# Altium PCB EduBOT_v2.PcbDoc
Units mm, origin at the board's own origin, x right, y up, seen from the top; angles counter-clockwise.
Board outline 65 x 56 mm, 4 copper layers (Top Signal Layer, Power Layer, Ground Layer, Bottom Signal Layer), stack 2.024 mm thick; 49 components, 37 nets, 214 pads, 140 vias.
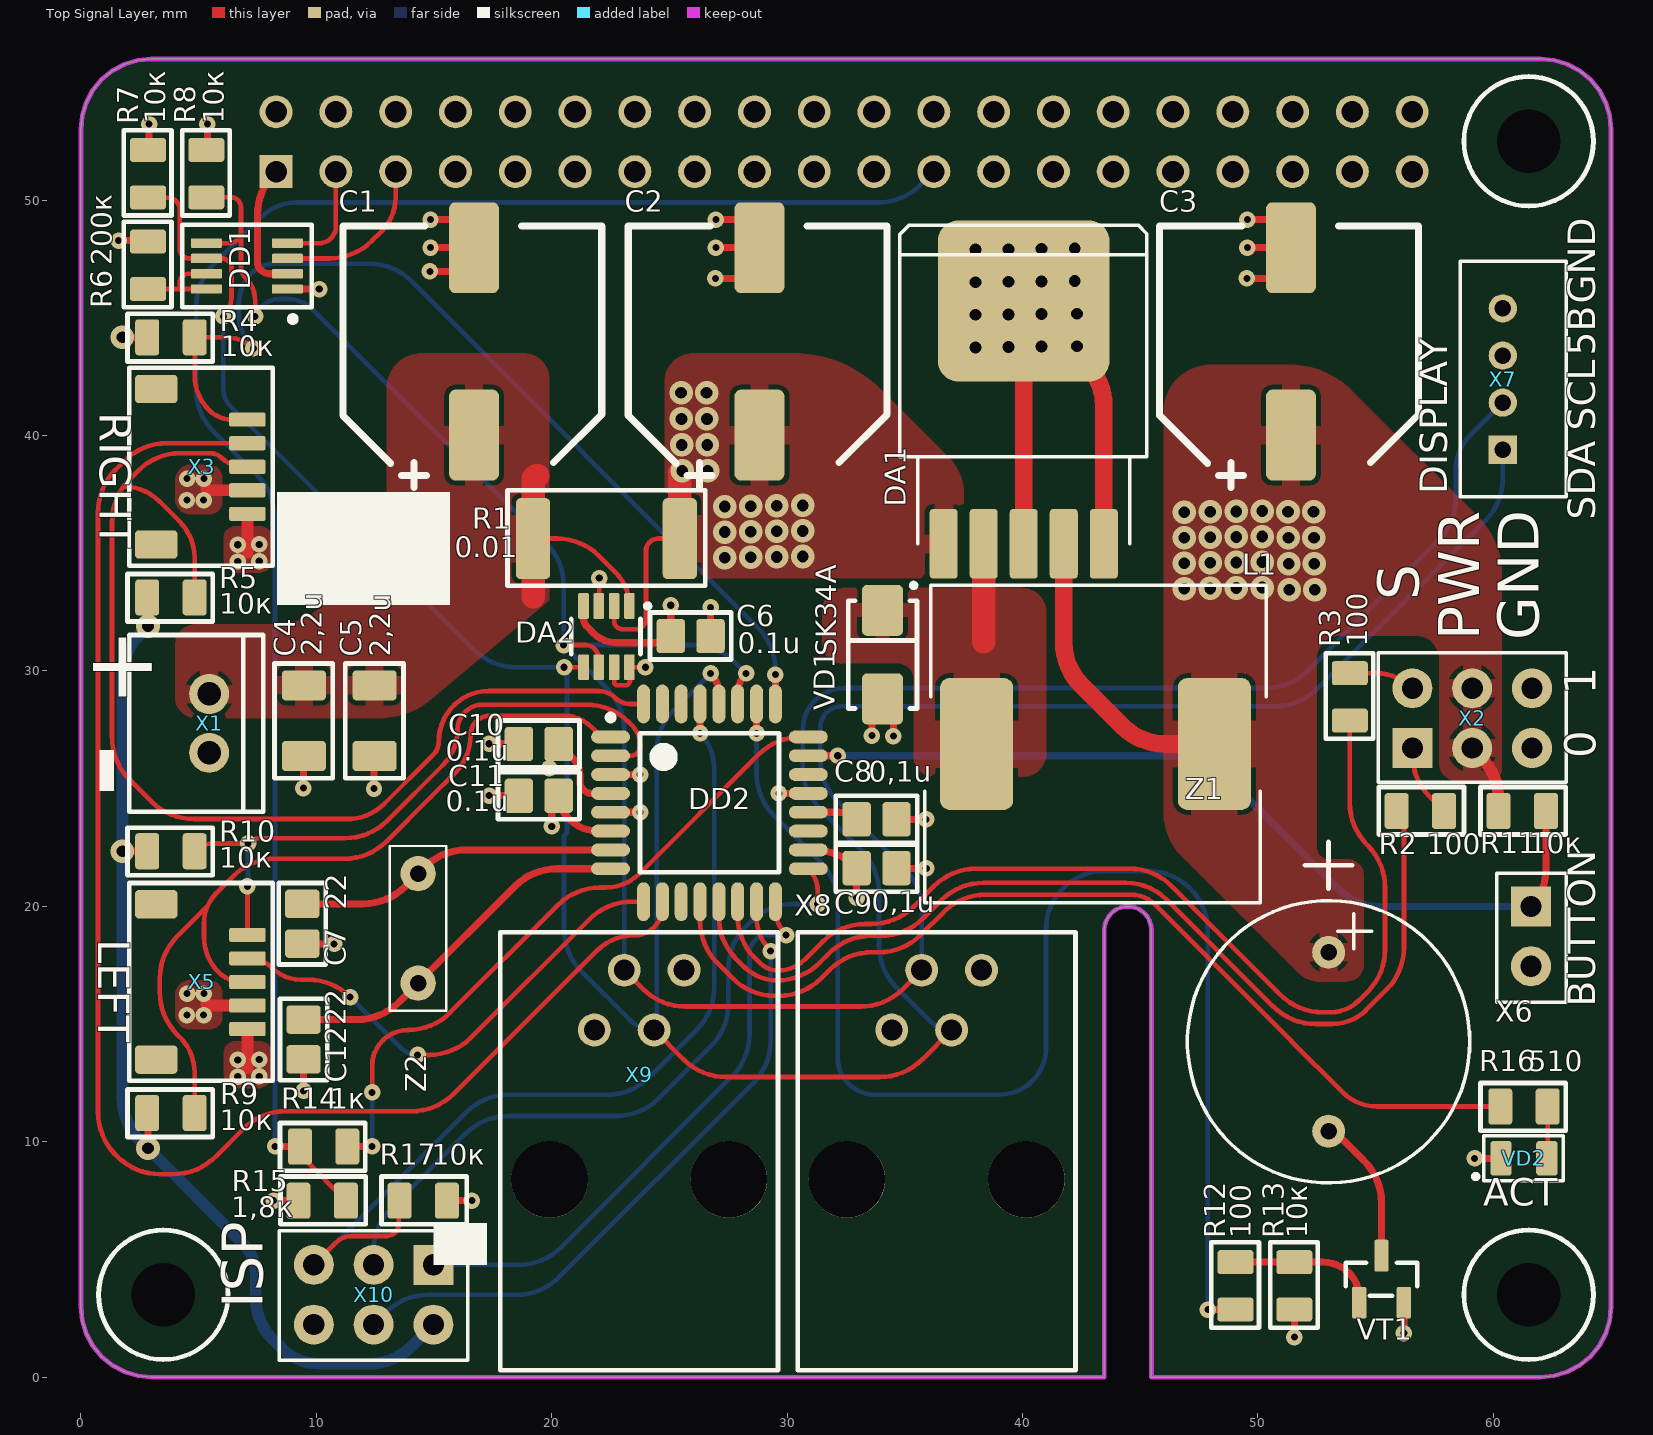
[diagram p0: Top Signal Layer view]
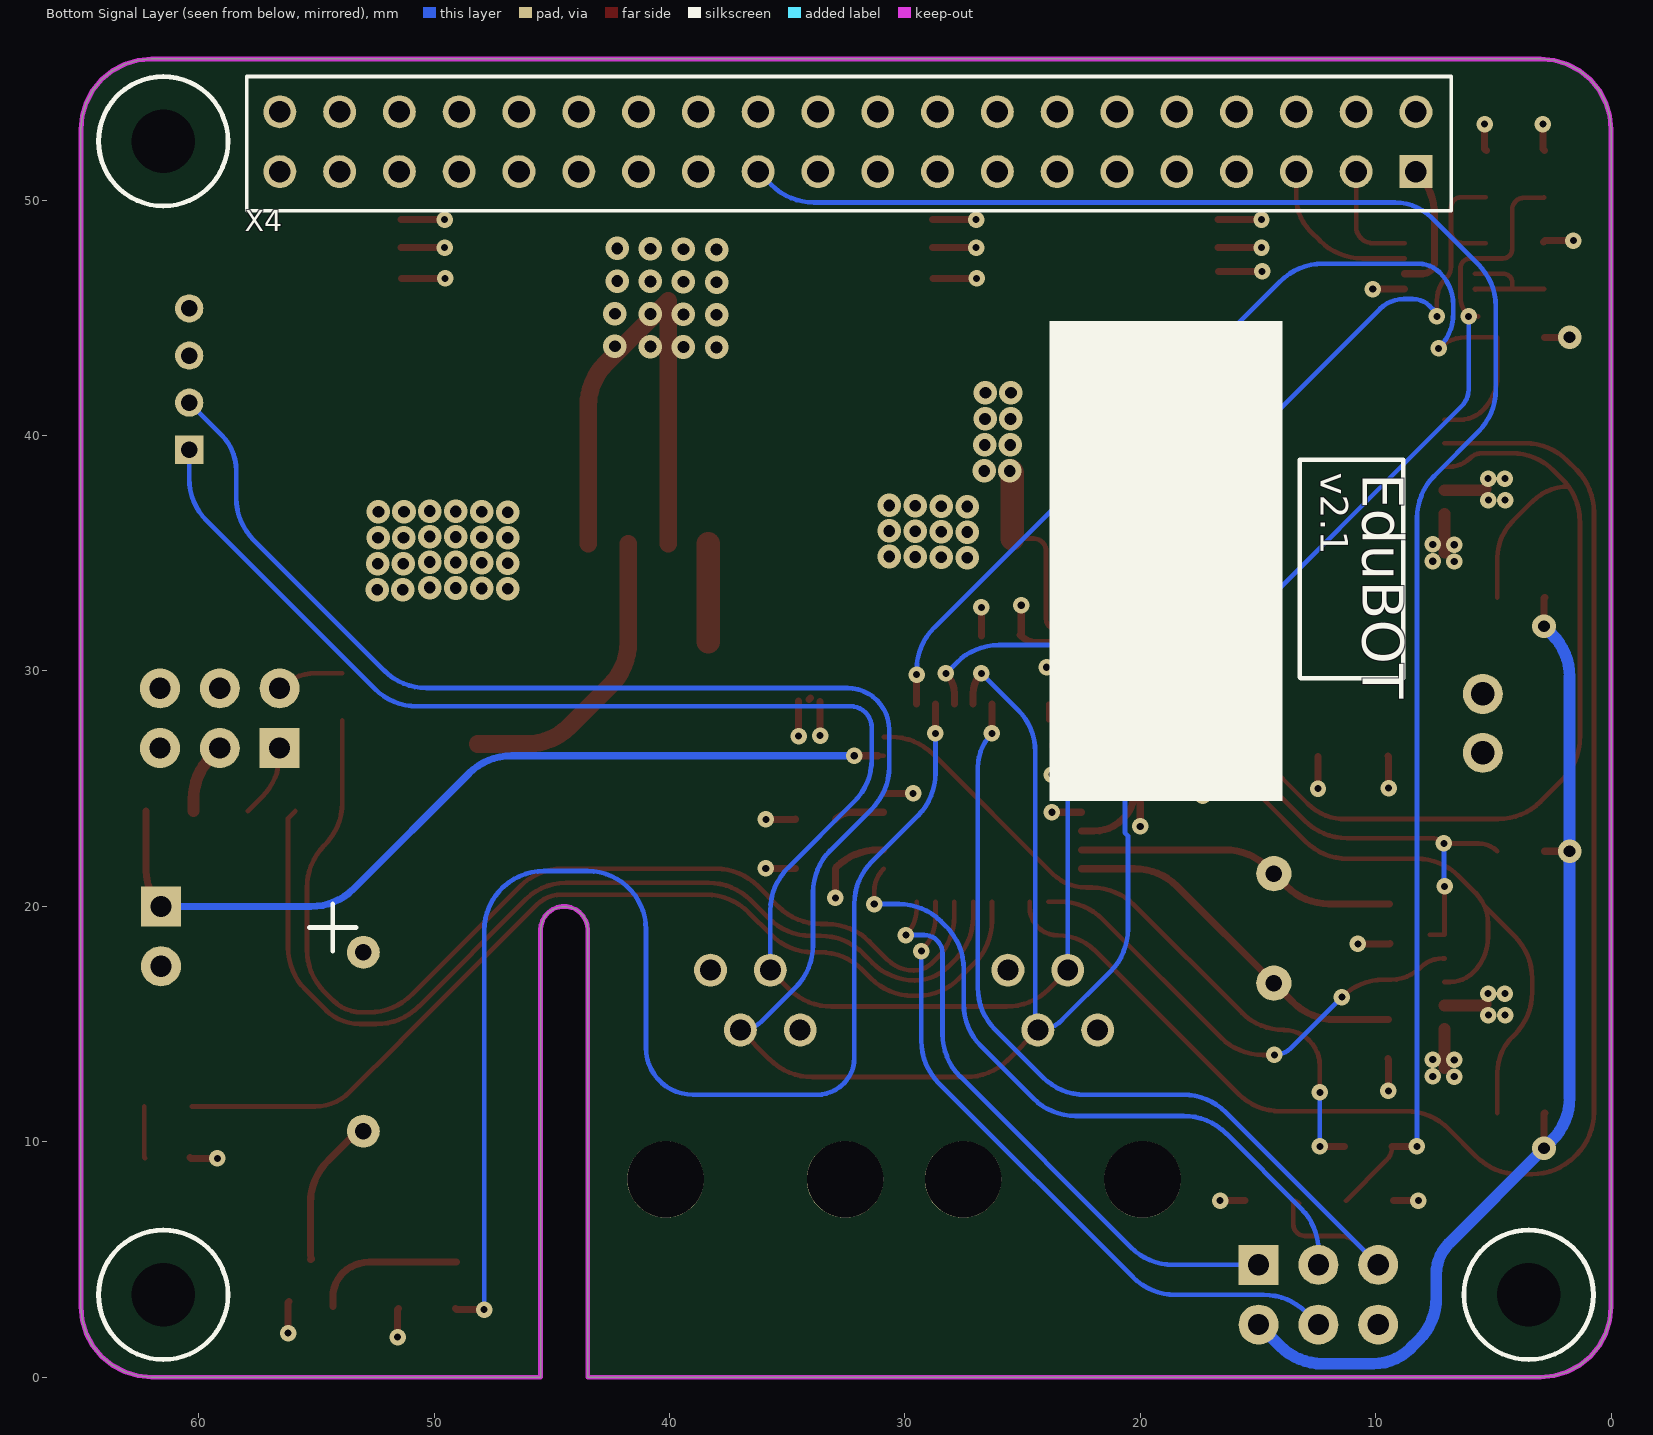
[diagram p1: Bottom Signal Layer view, seen from below]
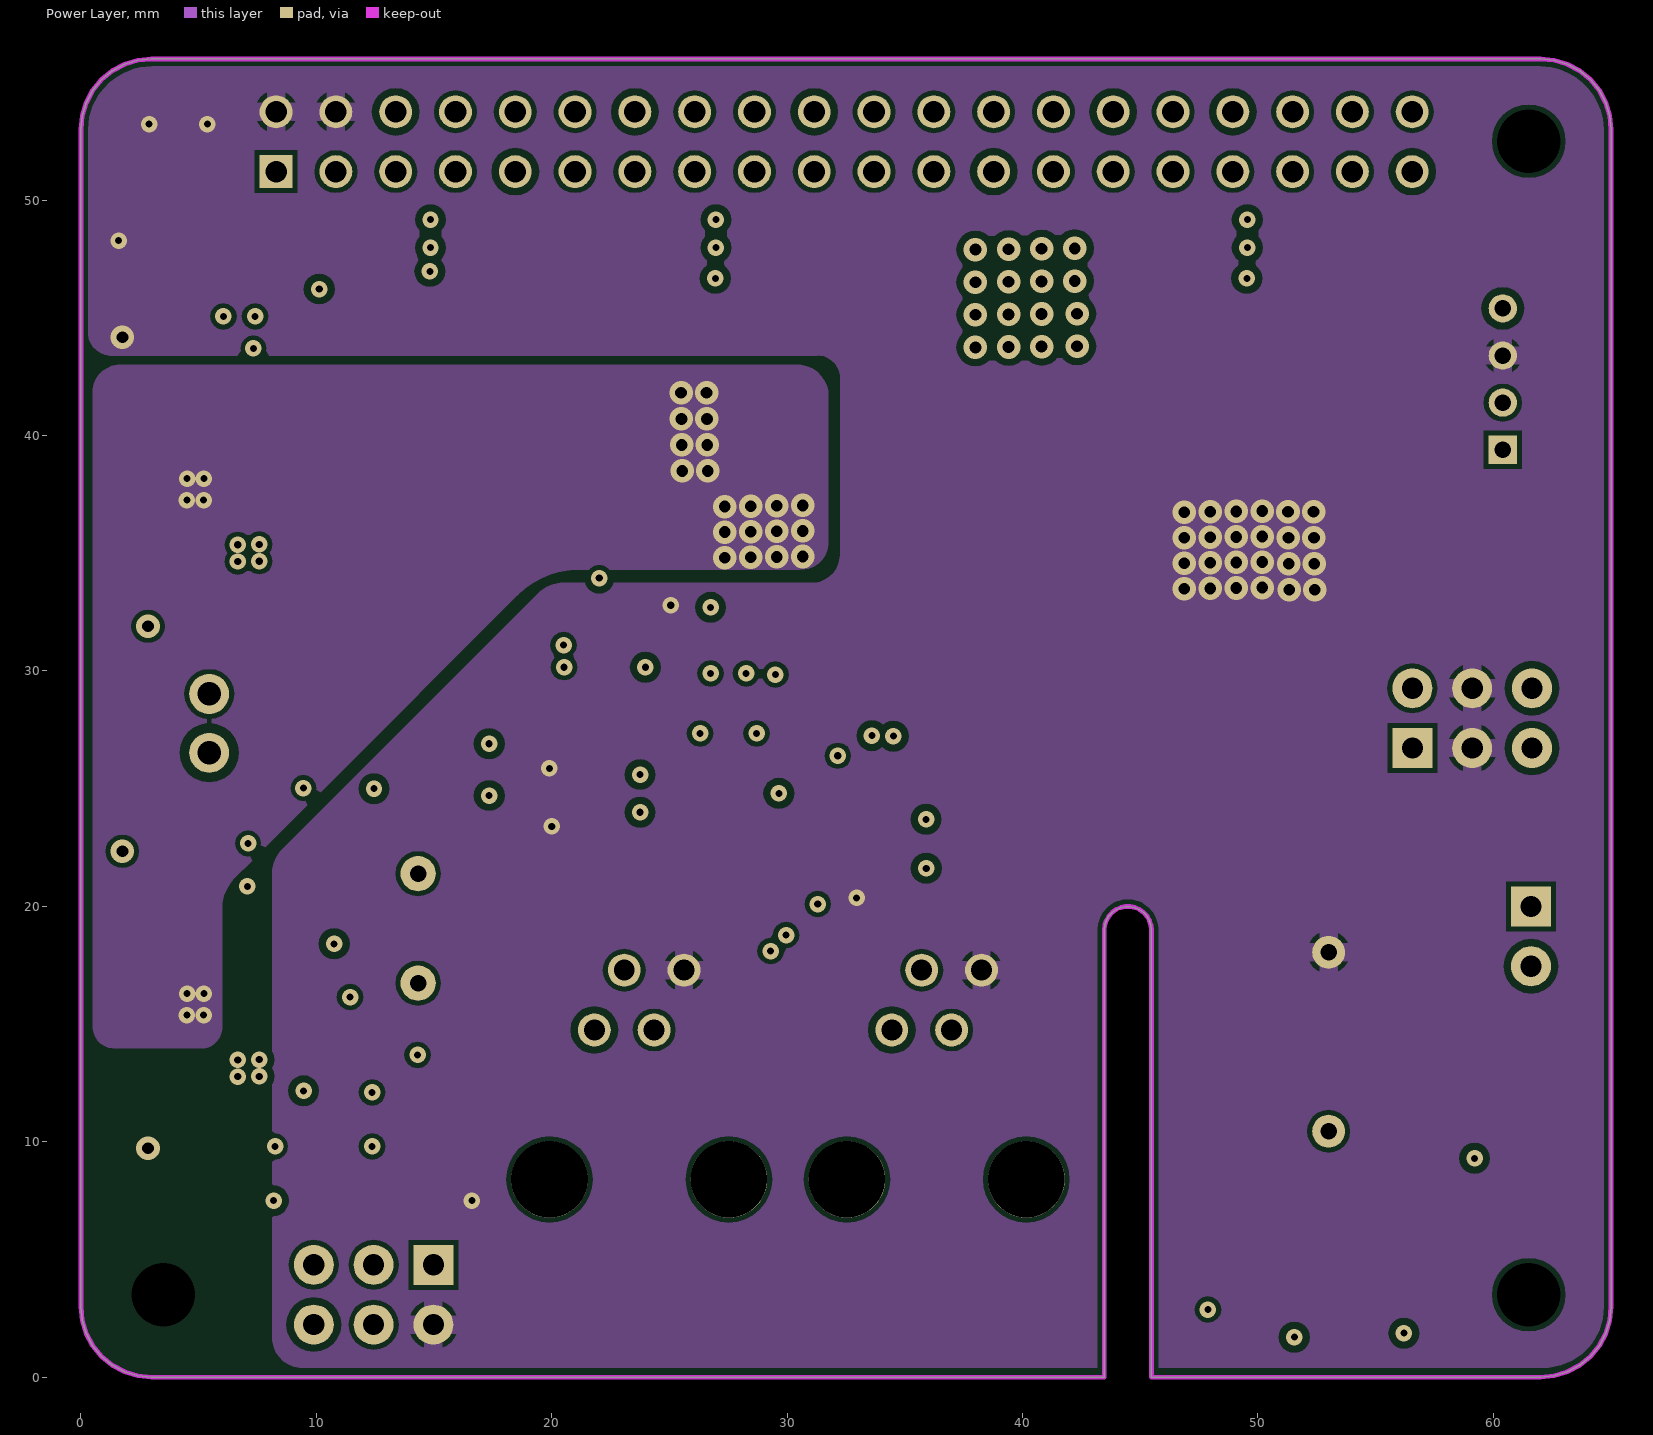
[diagram p2: Power Layer]
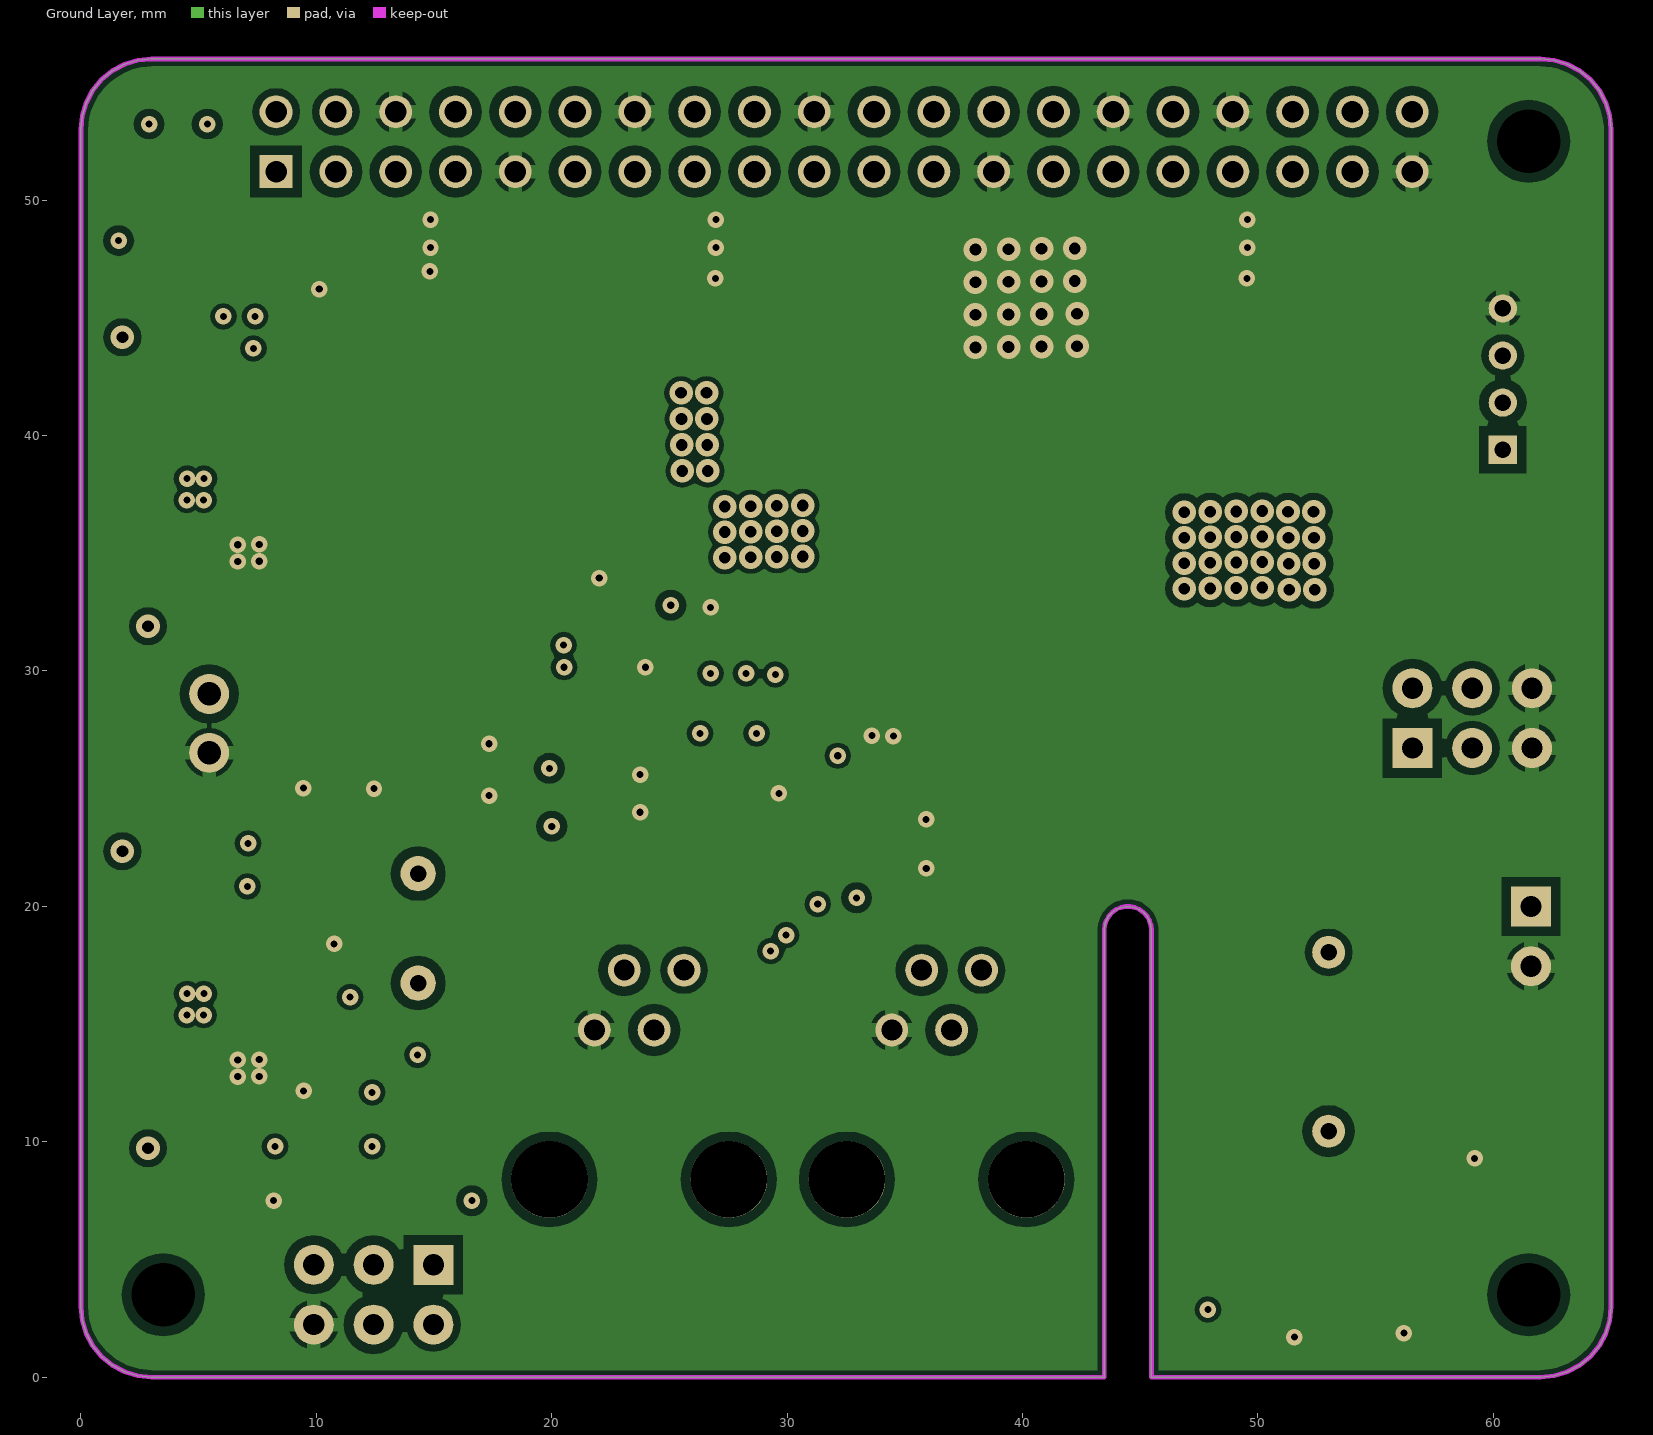
[diagram p3: Ground Layer]

## Layer stack, top to bottom
Top Solder: solder mask 0.0102, Solder Resist, Dk 3.5
Top Signal Layer: signal copper 0.0356
Dielectric 1: core 1.5, FR-4, Dk 4.2
Power Layer: signal copper 0.036
Dielectric 3: prepreg 0.127, Dk 4.2
Ground Layer: signal copper 0.036
Dielectric 2: core 0.254, Dk 4.2
Bottom Signal Layer: signal copper 0.0356
Bottom Solder: solder mask 0.0102, Solder Resist, Dk 3.5

## Board outline
0.506,1.333 0.228,1.852 0.058,2.415 0,3 0,53 0.058,53.585 0.228,54.148 0.506,54.667 0.879,55.121 1.333,55.494 1.852,55.772 2.415,55.942 3,56 62,56 62.585,55.942 63.148,55.772 63.667,55.494 64.121,55.121 64.494,54.667 64.772,54.148 64.942,53.585 65,53 65,3 64.942,2.415 64.772,1.852 64.494,1.333 64.121,0.879 63.667,0.506 63.148,0.228 62.585,0.058 62,0 45.475,0 45.475,19 45.453,19.208 45.389,19.407 45.284,19.588 45.144,19.743 44.975,19.866 44.784,19.951 44.58,19.995 44.37,19.995 44.166,19.951 43.975,19.866 43.806,19.743 43.666,19.588 43.561,19.407 43.497,19.208 43.475,19 43.475,0 3,0 2.415,0.058 1.852,0.228 1.333,0.506 0.879,0.879

## Design rules (kind name [scope] priority, off if disabled: settings)
Clearance Clearance_GND_5 [InNet('5В') vs InNet('GND')] p1: gap=0.3 except(0.2: Arc-SMDPad Track-Track Track-SMDPad SMDPad-SMDPad)
Clearance Clearance_GND [All vs InNet('GND')] p2: gap=0.2 except(0.4: Arc-THPad Track-THPad THPad-Fill THPad-Poly THPad-Region)
Clearance [All] p3: gap=0.2
ComponentClearance [All] p1: gap=0.001 collisioncheckmode=3 verticalgap=0 showdistances=FALSE
Height [All] p1: minheight=0 maxheight=100 prefheight=12.7
HoleSize [All] p1: absolutevalues=TRUE maxlimit=10 minlimit=0.3 maxpercent=80.000 minpercent=20.000
MinimumSolderMaskSliver [All] p1: minsoldermaskwidth=0.05
PolygonConnect PolygonConnect_Via [IsVia] p1: connectstyle=Direct reliefconductorwidth=0.254 reliefentries=4 polygonreliefangle="90 Angle" airgapwidth=0.2
PolygonConnect PolygonConnect_IND [HasFootprint('IND_12.8x12.8')] p2: connectstyle=Relief reliefconductorwidth=2 reliefentries=4 polygonreliefangle="90 Angle" airgapwidth=0.2
PolygonConnect PolygonConnect_R [HasFootprint('R2512')] p3: connectstyle=Relief reliefconductorwidth=2 reliefentries=4 polygonreliefangle="90 Angle" airgapwidth=0.2
PolygonConnect PolygonConnect_5B [InNet('5В')] p4: connectstyle=Relief reliefconductorwidth=0.8 reliefentries=4 polygonreliefangle="90 Angle" airgapwidth=0.2
PolygonConnect PolygonConnect_8B [InNet('8,4В')] p5: connectstyle=Relief reliefconductorwidth=0.8 reliefentries=4 polygonreliefangle="90 Angle" airgapwidth=0.2
PolygonConnect PolygonConnect_INPWR [InNet('NetC1_1')] p6: connectstyle=Relief reliefconductorwidth=0.8 reliefentries=4 polygonreliefangle="90 Angle" airgapwidth=0.2
PolygonConnect [All] p7: connectstyle=Relief reliefconductorwidth=0.6 reliefentries=4 polygonreliefangle="90 Angle" airgapwidth=0.2
RoutingVias [All] p1: holewidth=0.711 width=1.27 viastyle="Through Hole" minholewidth=0.711 minwidth=1.27 maxholewidth=0.711 maxwidth=1.27
ShortCircuit ShortCircuitAll [All] p1: allowed=FALSE
SilkToSilkClearance [All] p1: silktosilkclearance=0
SilkToSolderMaskClearance [IsPad] p1: minsilkscreentomaskgap=0 clearancetoexposedcopper=TRUE
SolderMaskExpansion [All] p1: expansion=0.05
Width [All] p1: maxlimit=4 minlimit=0.2 preferedwidth=0.2
Width 3,3В [InNet('3,3В')] p2: maxlimit=2 minlimit=0.2 preferedwidth=1
Width 24В [InNet('24В')] p3: maxlimit=4 minlimit=0.2 preferedwidth=4
Width 5В [InNet('5В')] p4: maxlimit=3 minlimit=0.2 preferedwidth=3
23 further rules are at their usual default settings.

## Components (designator, comment, footprint, x,y, rotation, side; value= is the part's Value field where it differs from the comment)
C1 "Capacitor_pol" Cap_SMD_radial_polar(10x10.5) 16.7,44 r180 top
C2 "Capacitor_pol" Cap_SMD_radial_polar(10x10.5) 28.825,44 r180 top
C3 "Capacitor_pol" Cap_SMD_radial_polar(10x10.5) 51.4,44 r180 top
C4 "Capacitor" C1206 9.45,27.918 r90 top
C5 "Capacitor" C1206 12.45,27.918 r90 top
C6 "Capacitor" C0805 25.9,31.485 r180 top
C7 "Capacitor" C0805 9.405,19.266 r90 top
C8 "Capacitor" C0805 33.8,23.7 r180 top
C9 "Capacitor" C0805 33.8,21.626 r180 top
C10 "Capacitor" C0805 19.45,26.9 r0 top
C11 "Capacitor" C0805 19.45,24.7 r0 top
C12 "Capacitor" C0805 9.458,14.348 r90 top
DA1 "LM2596S" TO-263-5 40.05,35.403 r0 top
DA2 "INA219BIDCNT" SOT23-8 22.325,31.459 r270 top
DD1 "PCA9306DCTR" SSOP8 7.05,47.2 r180 top
DD2 "ATmega328P-AU" TQFP-32 26.7,24.4 r0 top
L1 "Inductor" IND_12.8x12.8 43.1,26.9 r0 top
R1 "Resistor_1Вт" R2512 22.325,35.625 r0 top
R2 "Resistor_0,125Вт" R0805 56.9,24.05 r0 top
R3 "Resistor_0,125Вт" R0805 53.9,28.9 r90 top
R4 "Resistor_0,125Вт" R0805 3.825,44.175 r180 top
R5 "Resistor_0,125Вт" R0805 3.825,33.124 r180 top
R6 "Resistor_0,125Вт" R0805 2.85,47.23 r90 top
R7 "Resistor_0,125Вт" R0805 2.85,51.125 r90 top
R8 "Resistor_0,125Вт" R0805 5.325,51.125 r90 top
R9 "Resistor_0,125Вт" R0805 3.825,11.225 r180 top
R10 "Resistor_0,125Вт" R0805 3.825,22.342 r180 top
R11 "Resistor_0,125Вт" R0805 61.225,24.05 r0 top
R12 "Resistor_0,125Вт" R0805 49.045,3.88 r90 top
R13 "Resistor_0,125Вт" R0805 51.545,3.88 r90 top
R14 "Resistor_0,125Вт" R0805 10.309,9.801 r180 top
R15 "Resistor_0,125Вт" R0805 10.249,7.5 r0 top
R16 "Resistor_0,125Вт" R0805 61.3,11.5 r180 top
R17 "Resistor_0,125Вт" R0805 14.541,7.5 r0 top
VD1 "DiodeSchottky" SMA 34.053,30.695 r270 top
VD2 "LED" L_0805 61.3,9.3 r0 top
VT1 "N-MOSFET" SOT23-3 55.25,4.166 r90 top
X1 "" CWF-2 5,27.75 r180 top
X2 "Header_6_sct" PLS2-6 59.2,28 r90 top
X3 "Двигатель А" SM05B-SRSS-TB 4.65,38.675 r270 top
X4 "" PBS-40 8.291,51.213 r270 bottom locked
X5 "Двигатель А" SM05B-SRSS-TB 4.65,16.791 r270 top
X6 "" JUMPER_2.54 61.6,17.457 r0 top
X7 "Дисплей" MW-4M 60.4,42.4 r180 top
X8 "Header_4_sct" RJ9_4P4C 36.35,8.4 r180 top
X9 "Header_4_sct" RJ9_4P4C 23.715,8.4 r180 top
X10 "Программатор" PLS2-6 12.333,3.5 r270 top
Z1 "Name" Buzzer_gen_12mm 53,14.25 r270 top
Z2 "Crystal" HC-49S 14.325,19.066 r90 top

## Footprints (in the part's own frame and the unit in brackets; to place one, negate y for a bottom-side part, rotate by r counter-clockwise, add the part's x,y. Pads: shape width x height; smd on the part's side, far side on the other; paste and mask are expansions set on the pad)
Buzzer_gen_12mm [mm] "Излучатель звука"
  round 1.4 hole 0.7: 1(-3.8,0) 2(3.8,0)
  silkscreen extent -6,-6 6,6, body extent -9.5,-6.1 5.95,5.9, height 10.95
C0805 [mm]
  rrect25% 1.21x1.46 smd paste-5: 1(-0.845,0) 2(0.845,0)
  silkscreen extent -1.73,-1 1.73,1, body extent -1,-0.62 1,0.63, height 0.78
C1206 [mm]
  rrect25% 1.28x1.87 smd: 1(-1.528,-0.024) 2(1.472,-0.024)
  silkscreen extent -2.47,-1.25 2.4,1.23, body extent -1.6,-0.85 1.6,0.85, height 1.75
Cap_SMD_radial_polar(10x10.5) [mm] "ECAP SMD, 220 мкФ, 35В"
  rrect25% 2.12x3.86 smd: 1(0,3.98) 2(0,-3.98)
  silkscreen extent -5.43,-4.9 5.58,6.2, body extent -4.17,-5.15 4.13,4.75, height 10.2
CWF-2 [mm]
  round 1.7 hole 1: 1(-0.45,-1.275) 2(-0.45,1.225)
  silkscreen extent -2.75,-3.77 2.95,3.73, body extent -2.7,-3.73 3,3.78, height 7.7
HC-49S [mm] "Кварцевый резонатор"
  round 1.5 hole 0.7: 1(-2.325,0) 2(2.325,0)
  silkscreen extent -3.5,-1.2 3.5,1.2, body extent -5.67,-2.32 5.68,2.33, height 3.6
IND_12.8x12.8 [mm]
  rrect25% 3.1x5.6 smd: 1(-5.05,0) 2(5.05,0)
  silkscreen extent -7.25,-6.75 7.25,6.75, body extent -6.25,-6.25 6.25,6.25, height 8
JUMPER_2.54 [mm] "Разъем для программатора ISP"
  rect 1.7x1.7 hole 0.9: 1(0,2.54)
  round 1.7 hole 0.9: 2(0,0)
  silkscreen extent -1.45,-1.54 1.5,3.95, body extent -1.26,-1.35 1.28,3.79, height 8.54
L_0805 [mm] "SMD LED LAMP"
  rrect25% 0.91x1.46 smd: 1(-0.975,0) 2(0.975,0)
  silkscreen extent -2.15,-0.95 1.68,0.95, body extent -1.01,-0.62 1.01,0.63, height 1.1
MW-4M [mm]
  rect 1.2x1.2 hole 0.7: 1(0,3)
  round 1.2 hole 0.7: 2(0,1) 3(0,-1) 4(0,-3)
  silkscreen extent -2.7,-5 1.8,5, body extent -2.7,-4.95 1.8,4.95, height 6
PBS-40 [mm]
  rect 1.4x1.4 hole 0.92: 1(0,0)
  round 1.4 hole 0.92: 2(-2.54,0) 3(0,-2.54) 4(-2.54,-2.54) 5(0,-5.08) 6(-2.54,-5.08) 8(-2.54,-7.62) 9(0,-10.16) 10(-2.54,-10.16) 11(0,-12.7) 12(-2.54,-12.7) 13(0,-15.24) 14(-2.54,-15.24) 15(0,-17.78) 16(-2.54,-17.78) 19(0,-22.86) 20(-2.54,-22.86) 21(0,-25.4) 22(-2.54,-25.4) 23(0,-27.94) 24(-2.54,-27.94) 25(0,-30.48) 26(-2.54,-30.48) 27(0,-33.02) 28(-2.54,-33.02) 31(0,-38.1) 32(-2.54,-38.1) 33(0,-40.64) 34(-2.54,-40.64) 35(0,-43.18) 36(-2.54,-43.18) 39(0,-48.26) 40(-2.54,-48.26)
  round 1.4 hole 0.92 mask+0.102: 7(0,-7.62) 17(0,-20.32) 18(-2.54,-20.32) 29(0,-35.56) 30(-2.54,-35.56) 37(0,-45.72) 38(-2.54,-45.72)
  silkscreen extent -4.04,-49.66 1.66,1.5, body extent -3.81,-49.53 1.27,1.27, height 8.4
PLS2-6 [mm] "Разъем для программатора ISP"
  rect 1.7x1.7 hole 0.9: 1(-1.275,2.64)
  round 1.7 hole 0.9: 2(1.265,2.64) 3(-1.275,0.1) 4(1.265,0.1) 5(-1.275,-2.44) 6(1.265,-2.44)
  silkscreen extent -2.73,-3.9 2.77,4.1, body extent -2.52,-3.72 2.56,3.9, height 8.54
R0805 [mm] "Chip Resistor, 2-Leads, Body 2,10x1,30mm, IPC Medium Density"
  rrect25% 1.02x1.53 smd paste-5: 1(-1.007,0) 2(1.007,0)
  silkscreen extent -1.78,-1 1.85,1.03, body extent -1.1,-0.7 1.1,0.7, height 0.55
R2512 [mm]
  rrect25% 1.45x3.43 smd: 1(-3.115,0) 2(3.115,0)
  silkscreen extent -4.2,-2 4.2,2.05, body extent -3.35,-1.6 3.35,1.6, height 0.55
RJ9_4P4C [mm]
  round 1.398 hole 0.89: 1(-1.905,-8.89) 2(-0.635,-6.35) 3(0.635,-8.89) 4(1.905,-6.35)
  round 3.25 hole 3.25 unplated: ""(-3.81,0) ""(3.81,0)
  silkscreen extent -5.9,-10.5 5.9,8.1, body extent -5.59,-10.15 5.59,7.85, height 11.65
SM05B-SRSS-TB [mm]
  rrect25% 0.6x1.55 smd: 1(-2,2.425) 2(-1,2.425) 3(0,2.425) 4(1,2.425) 5(2,2.425)
  rrect25% 1.2x1.8 smd: ""(-3.3,-1.45) ""(3.3,-1.45)
  silkscreen extent -4.2,-2.6 4.2,3.5, body extent -3.5,-2.2 3.5,2.75, height 2.9
SMA [mm]
  rrect25% 2.17x1.74 smd: 1(-1.88,0) 2(1.88,0)
  silkscreen extent -3.04,-1.46 2.29,1.46, body extent -2.5,-1.35 2.5,1.35, height 2.15
SOT23-3 [mm]
  rrect25% 1.35x0.61 smd: 1(-1,0.95) 2(1,0) 3(-1,-0.95)
  silkscreen extent -0.7,-1.52 0.7,1.52, body extent -1.15,-1.5 1.15,1.5, height 1.1
SOT23-8 [mm]
  rrect25% 1.1x0.45 smd: 1(-1.3,0.975) 2(-1.3,0.325) 3(-1.3,-0.325) 4(-1.3,-0.975) 5(1.3,-0.975) 6(1.3,-0.325) 7(1.3,0.325) 8(1.3,0.975)
  silkscreen extent -1.4,-1.5 0.75,1.85, body extent -1.43,-1.5 1.37,1.44, height 1.2
SSOP8 [mm]
  rrect25% 1.32x0.4 smd: 1(-1.72,0.975) 2(-1.72,0.325) 3(-1.72,-0.325) 4(-1.72,-0.975) 5(1.72,-0.975) 6(1.72,-0.325) 7(1.72,0.325) 8(1.72,0.975)
  silkscreen extent -2.75,-1.75 2.75,2.37, body extent -2.1,-1.53 2.1,1.53, height 1.3
TO-263-5 [mm]
  rrect25% 1.19x2.96 smd: 1(-3.4,0) 2(-1.7,0) 3(0,0) 4(1.7,0) 5(3.4,0)
  rrect25% 7.28x6.84 smd: 6(0,10.315)
  silkscreen extent -5.26,0 5.23,13.54, body extent -5.08,-0.9 5.1,13.45, height 4.58
TQFP-32 [mm] "Thin QFP, 32-Leads, Body 7x7mm, Pitch 0.8mm, IPC Medium Density"
  oval 1.65x0.55 smd: 1(-4.2,2.8) 2(-4.2,2) 3(-4.2,1.2) 4(-4.2,0.4) 5(-4.2,-0.4) 6(-4.2,-1.2) 7(-4.2,-2) 8(-4.2,-2.8) 17(4.2,-2.8) 18(4.2,-2) 19(4.2,-1.2) 20(4.2,-0.4) 21(4.2,0.4) 22(4.2,1.2) 23(4.2,2) 24(4.2,2.8)
  oval 0.55x1.65 smd: 9(-2.8,-4.2) 10(-2,-4.2) 11(-1.2,-4.2) 12(-0.4,-4.2) 13(0.4,-4.2) 14(1.2,-4.2) 15(2,-4.2) 16(2.8,-4.2) 25(2.8,4.2) 26(2,4.2) 27(1.2,4.2) 28(0.4,4.2) 29(-0.4,4.2) 30(-1.2,4.2) 31(-2,4.2) 32(-2.8,4.2)
  silkscreen extent -4.32,-2.95 2.95,3.75, body extent -4.6,-4.6 4.6,4.6, height 1.2

## Part data
C1 C2 C3: library part cap194, "Конденсатор полярный"
C4 C5: library part cap188, "Конденсатор"
C6 C8 C9 C10 C11: library part cap161, "Конденсатор"
C7 C12: library part cap223, "Конденсатор"
DA1: library part pwr3, "3-A Step-Down Voltage Regulator"
DA2: library part interf16, "Токочувствительный усилитель"
DD1: library part interf13, "DUAL BIDIRECTIONAL I2C BUS AND SMBus VOLTAGE-LEVEL TRANSLATOR"
DD2: library part microcont1, "Микроконтроллер 8-Бит, picoPower, AVR, 20МГц, 32КБ Flash"
L1: library part ind80, "EMI Suppression Filter"
R1: library part res777, "Резистор"
R2 R3 R12: library part res49, "Резистор"
R4 R5 R9 R10 R11 R13 R17: library part res97, "Резистор"
R6: library part res132, "Резистор"
R7 R8: library part res125, "Резистор"
R14: library part res76, "Резистор"
R15: library part res83, "Резистор"
R16: library part res66, "Резистор"
VD1: library part diode1, "Диод Шоттки"
VD2: library part diode5, "Светодиод"
VT1: library part mosfert2
X1: library part connect15, "Разъем - 2 конт. вилка"
X2 X10: library part connect0, "Разъем - 6 конт. розетка"
X3 X5: library part connect113, "Разъем - 5 конт. розетка"
X4: library part Header_40, "Разъем - 5 конт. розетка"
X6: library part connect54, "Разъем - 2 конт. вилка"
X7: library part connect80, "Разъем - 4 конт. розетка"
X8 X9: library part connect72, "Разъем - 4 конт. розетка"
Z1: library part buzzer2, "Пьезоизлучатель звуковой без генератора"
Z2: library part crystal7, "Кварцевый резонатор"

## Free pads (board coordinates)
  round 0 hole 2.7 unplated: ""(3.5,3.5) ""(61.5,3.5) ""(61.5,52.5)

## Via types
v1: diameter 0.7, hole 0.3, Top Signal Layer to Bottom Signal Layer, tented both sides, 76 vias
v2: diameter 1, hole 0.5, Top Signal Layer to Bottom Signal Layer, tented both sides, 64 vias

## Nets (pads, with @x,y where several pads share a name; then routed paths per layer and width w, separated by ;. In a path a pad name is that pad's centre, name@x,y a point inside that pad or via, vN(x,y) a via of type N, cw(c..) or ccw(c..) an arc to the next point about the centre after c; other vN are vias at no path point)
3,3B: DD1.2 X4.1 | length 5.6
  Top Signal Layer w0.3: X4.1 8.244,51.166 ccw(c10.04,49.37) 7.5,49.37 7.5,47.375 ccw(c8,47.375) 8,46.875 DD1.2
5В: C3.1 C6.2 C9.2 C10.2 C11.2 DA1.4 DA2.4 DD2.4 DD2.6 DD2.18 L1.2 R4.2 R5.2 R6.2 R7.2 R8.2 R9.2 R10.2 R11.1 R17.2 X2.3 X2.4 X4.2 X4.4 X7.3 X8.1 X9.1 X10.2 Z1.1 | length 85.3
  Top Signal Layer w0.3: v1(1.6,48.283) 2.805,48.283 R6.2 R6.2@2.874,48.213 ; v2(1.761,22.342) R10.2 ; v2(1.761,44.175) R4.2 ; R9.2 2.85,11.193 v2(2.85,9.725) ; R5.2 2.85,33.091 v2(2.85,31.899) v2@2.85,31.624 ; R7.2@2.826,52.108 R7.2 2.895,52.178 v1(2.895,53.234) ; R8.2@5.301,52.108 R8.2 5.37,52.178 v1(5.37,53.234) ; R17.2 v1(16.605,7.5) ; v1(19.9,25.863) 19.9,26.505 C10.2 20.9,26.295 cw(c20.176,25.571) 21.2,25.571 21.2,25.3 ccw(c21.7,25.3) 21.7,24.8 DD2.4 ; v1(20,23.4) 20,24.413 C11.2@20.284,24.697 ; C11.2@20.536,24.8 ccw(c20.536,24.459) C11.2 ccw(c21.611,24.7) 20.68,23.77 20.75,23.7 ccw(c21.957,24.907) 21.957,23.2 DD2.6 ; DA2.4 21.35,32.24 ccw(c21.862,32.24) 21.474,31.907 21.775,31.606 ccw(c22.754,32.585) 22.754,31.2 24.367,31.2 ccw(c24.367,32.173) C6.2 25.1,31.53 25.055,31.575 v1(25.055,32.792) ; DD2.18 31.129,22.4 cw(c31.129,19.86) C9.2@32.925,21.656 ; v1(32.947,20.363) C9.2@32.947,21.618
  Top Signal Layer w0.5: X2.3 59.474,26.351 cw(c57.678,24.555) 60.218,24.555 R11.1
  Top Signal Layer w0.75: DA1.4 41.75,31.202 ccw(c44.29,31.202) 42.494,29.406 44.256,27.644 ccw(c46.052,29.44) 46.052,26.9 L1.2
  Bottom Signal Layer w0.5: v2(2.85,31.899) 2.505,31.554 ccw(c4.301,29.758) 1.761,29.758 v2(1.761,22.342) 1.761,11.866 ccw(c4.301,11.866) 2.505,10.07 v2(2.85,9.725) 6.877,5.698 cw(c5.554,4.375) 7.425,4.375 7.425,3.377 ccw(c9.965,3.377) 8.169,1.581 8.525,1.225 ccw(c10.094,2.794) 10.094,0.575 12.261,0.575 ccw(c12.261,3.115) 14.057,1.319 X10.2
  other v2: 51.325,33.449 52.409,33.449 46.865,33.492 47.97,33.509 49.075,33.525 50.18,33.541 51.308,34.554 52.393,34.554 46.865,34.577 47.97,34.593 49.075,34.61 50.18,34.626 46.865,35.662 47.97,35.678 51.292,35.659 52.377,35.659 49.075,35.694 50.18,35.71 46.865,36.746 47.97,36.762 51.276,36.764 52.36,36.764 49.075,36.779 50.18,36.795
8,4В: C2.1 DA1.1 DA2.2 R1.2 X3.4 X5.4 | length 13.6
  Top Signal Layer w0.2: DA2.2 22.65,32.125 ccw(c23,32.125) 23,31.775 23.575,31.775 ccw(c23.575,32.2) 24,32.2 24,35.1 cw(c24.525,35.1) 24.525,35.625 R1.2
  Top Signal Layer w0.5: 5.325,15.891 ccw(c5.425,15.891) 5.425,15.791 X5.4 ; 5.325,37.775 ccw(c5.425,37.775) 5.425,37.675 X3.4
  Top Signal Layer w1: R1.2 25.44,38.399 cw(c25.542,38.399) v2(25.542,38.5)
  other v1: 4.501,15.378 5.213,15.378 4.513,16.291 5.225,16.291 4.501,37.262 5.213,37.262 4.513,38.175 5.225,38.175
  other v2: 27.35,34.815 28.455,34.831 29.56,34.847 30.664,34.863 27.35,35.899 28.455,35.915 29.56,35.932 30.664,35.948 27.35,36.984 28.455,37 29.56,37.016 30.664,37.033 26.626,38.5 25.525,39.605 26.61,39.605 25.509,40.71 26.594,40.71 25.493,41.814 26.577,41.814
BUTTON: DD2.23 R11.2 X6.1 | length 37.4
  Top Signal Layer w0.2: DD2.23 DD2.23@31.151,26.4
  Top Signal Layer w0.3: DD2.23@31.151,26.4 v1(32.15,26.4) ; X6.1 ccw(c60.073,21.524) 62.233,21.524 R11.2
  Bottom Signal Layer w0.3: v1(32.15,26.4) 46.711,26.4 cw(c46.711,23.86) 48.507,25.656 53.422,20.741 ccw(c55.218,22.537) 55.218,19.997 X6.1
BUZZER: DD2.26 R12.1 | length 59.4
  Top Signal Layer w0.3: v1(28.7,27.35) DD2.26 ; v1(47.872,2.873) R12.1 R12.1@49.086,2.914
  Bottom Signal Layer w0.2: v1(28.7,27.35) 28.7,25.652 ccw(c31.24,25.652) 29.444,23.856 31.4,21.9 cw(c29.604,20.104) 32.144,20.104 32.144,13.582 ccw(c33.726,13.582) 33.726,12 39,12 ccw(c39,14) 41,14 41,19.029 cw(c43.471,19.029) 43.471,21.5 45.332,21.5 cw(c45.332,18.96) 47.872,18.96 v1(47.872,2.873) v1@47.743,2.744
CW/CCW_A: DD2.25 R4.1 X3.1 | length 42.5
  Top Signal Layer w0.2: X3.1 6.413,40.675 cw(c6.413,42.041) 5.447,41.075 cw(c6.931,42.559) 4.832,42.559 R4.1 6.178,44.175 cw(c6.178,42.553) v1(7.325,43.7)
  Top Signal Layer w0.3: DD2.25 v1(29.5,29.85)
  Bottom Signal Layer w0.2: v1(7.325,43.7) cw(c8.834,45.209) 6.7,45.209 6.7,45.537 cw(c8.663,45.537) 7.275,46.925 cw(c8.18,46.02) 8.18,47.3 12.248,47.3 cw(c12.248,44.76) 14.044,46.556 28.756,31.844 cw(c26.96,30.048) 29.5,30.048 v1(29.5,29.85)
CW/CCW_B: DD2.2 R10.1 X5.1 | length 28.8
  Top Signal Layer w0.2: R10.1 cw(c5.636,21.539) 5.636,22.675 v1(7.1,22.675) cw(c7.643,22.132) 7.643,22.9 11.223,22.9 ccw(c11.223,25.44) 13.019,23.644 15.381,26.006 ccw(c13.888,27.5) 16,27.5 cw(c17.071,27.5) 17.071,28.571 21.477,28.571 cw(c21.477,26.031) 23.273,27.827 23.4,27.7 cw(c22.555,26.855) 23.75,26.855 23.75,26.8 cw(c23.35,26.8) 23.35,26.4 DD2.2 ; v1(7.075,20.85) X5.1 X5.1@7.697,18.791
  Bottom Signal Layer w0.2: v1(7.075,20.85) ccw(c7.015,20.91) 7.1,20.91 v1(7.1,22.675)
FG_A_TR: DD2.32 R5.1 X3.3 | length 51
  Top Signal Layer w0.2: R5.1 4.832,34.798 ccw(c2.638,34.798) 4.19,36.35 3.338,37.201 ccw(c1.806,35.669) 1.806,37.836 ; X3.3 6.885,38.675 cw(c6.885,39.955) 5.98,39.05 ccw(c5.497,38.567) 5.497,39.25 4.227,39.25 ccw(c4.227,36.71) 2.431,38.506 2.069,38.144 ccw(c3.865,36.348) 1.806,37.836 ; 11.325,23.708 ccw(c11.325,25.9) 11.478,23.713 ; DD2.32@23.9,27.918 DD2.32 23.317,28.6 cw(c23.317,29.473) 22.7,28.856 ccw(c21.99,28.145) 21.99,29.15 17.325,29.15 ccw(c17.325,27.042) 15.835,28.532 ccw(c17.367,27) 15.2,27 cw(c14.415,27) 14.97,26.445 12.875,24.35 cw(c11.325,25.9) 11.478,23.713 ; 1.806,37.836 ccw(c3.865,36.348) 1.325,36.348 1.325,27.177 ccw(c3.865,27.177) 2.069,25.381 2.993,24.457 ccw(c4.789,26.253) 4.789,23.713 11.478,23.713
FG_B_TR: DD2.1 R9.1 X5.3 | length 35.4
  Top Signal Layer w0.2: R9.1 4.833,12.923 ccw(c2.673,12.923) 4.2,14.45 4.096,14.554 cw(c5.892,16.35) 3.352,16.35 3.352,16.933 cw(c5.892,16.933) 4.096,18.729 5.375,20.008 ; X5.3 6.838,16.791 cw(c6.838,18.188) 5.85,17.2 cw(c7.359,18.709) 5.225,18.709 5.225,19.283 cw(c7.053,19.283) 5.375,20.008 ; DD2.1 cw(c22.5,28.166) 21.817,27.483 21.669,27.631 ccw(c20.536,26.498) 20.536,28.1 17.359,28.1 ccw(c17.359,27.3) 16.559,27.3 cw(c14.237,27.3) 15.879,25.658 14.871,24.65 12.99,22.769 cw(c11.194,24.565) 11.194,22.025 8.262,22.025 ccw(c8.262,19.485) 6.466,21.281 5.76,20.575 ccw(c7.053,19.283) 5.375,20.008
GND: C1.2 C2.2 C3.2 C4.1 C5.1 C6.1 C7.1 C8.1 C9.1 C10.1 C11.1 C12.1 DA1.3 DA1.5 DA1.6 DA2.3 DA2.7 DA2.8 DD1.1 DD2.3 DD2.5 DD2.21 R13.1 R15.1 VD1.2 VD2.1 VT1.3 X1.2 X2.5 X2.6 X3.5 X4.6 X4.9 X4.14 X4.20 X4.25 X4.30 X4.34 X4.39 X5.5 X6.2 X7.4 X8.4 X9.4 X10.6 | length 70.9
  Top Signal Layer w0.2: DA2.3 22.019,32.778 v1(22.019,33.943) ; DA2.7 22.65,29.54 ccw(c22.8,29.54) 22.8,29.39 23.115,29.39 ccw(c23.115,29.6) 23.325,29.6 23.325,30.134 ccw(c23.3,30.134) DA2.8 v1(23.98,30.159)
  Top Signal Layer w0.3: v1(8.185,7.5) R15.1 ; DD1.1 v1(10.125,46.225) ; C7.1@9.393,18.433 9.417,18.409 v1(10.758,18.409) ; v1(9.45,25.025) 9.45,26.366 C4.1 ; v1(9.458,12.163) C12.1 C12.1@9.482,13.527 ; v1(12.45,25) 12.45,26.366 C5.1@12.458,26.374 ; v1(14.825,46.975) C1.2@16.675,46.975 ; v1(14.85,47.98) C1.2 ; v1(14.85,49.175) C1.2@16.7,49.175 ; v1(17.342,24.708) C11.1@18.597,24.708 ; v1(17.342,26.908) C10.1@18.597,26.908 ; DD2.5 v1(23.75,24) ; DD2.3 v1(23.75,25.6) ; C6.1 v1(26.745,32.702) ; v1(26.95,46.675) C2.2@28.8,46.675 ; v1(26.975,47.98) C2.2 ; v1(26.975,49.175) C2.2@28.825,49.175 ; v1(29.65,24.8) DD2.21 ; v1(33.602,27.255) VD1.2@33.603,28.712 ; VD1.2@34.012,28.856 VD1.2 VD1.2@34.078,28.79 ; v1(34.517,27.23) VD1.2@34.517,28.73 ; C8.1@34.637,23.708 C8.1 v1(35.9,23.7) ; C9.1@34.653,21.618 v1(35.908,21.618) ; v1(49.525,46.675) C3.2@51.375,46.675 ; v1(49.55,47.98) C3.2 ; v1(49.55,49.175) C3.2@51.4,49.175 ; R13.1@51.504,2.914 R13.1 v1(51.545,1.7) ; VT1.3@56.159,3.207 VT1.3 v1(56.2,1.87) ; v1(59.2,9.3) VD2.1 VD2.1@60.366,9.341
  Top Signal Layer w0.5: 7.075,13.141 X5.5 ; 7.075,13.691 ccw(c7.175,13.691) 7.175,13.591 ; 7.075,35.025 X3.5 ; 7.075,35.575 ccw(c7.175,35.575) 7.175,35.475
  Top Signal Layer w0.75: DA1.3 DA1.6 42.706,43.061 cw(c40.91,41.265) 43.45,41.265 DA1.5
  other v1: 6.662,12.766 7.575,12.779 6.662,13.479 7.575,13.491 6.662,34.651 7.575,34.663 6.662,35.363 7.575,35.375
  other v2: 38,43.746 39.405,43.763 40.81,43.779 42.314,43.795 38,45.131 39.405,45.147 40.81,45.163 42.314,45.18 38,46.515 39.405,46.532 40.81,46.548 42.214,46.564 38,47.9 39.405,47.916 40.81,47.933 42.214,47.949
GPIO_IN: DD2.24 R14.1 | length 28.6
  Top Signal Layer w0.2: v1(12.373,12.1) 12.373,13.225 cw(c13.898,13.225) 13.898,14.75 ccw(c13.898,17.29) 15.694,15.494 20.256,20.056 cw(c22.052,18.26) 22.052,20.8 22.3,20.8 ccw(c22.3,22.82) 23.729,21.392 28.793,26.456 cw(c30.589,24.66) 30.589,27.2 DD2.24
  Top Signal Layer w0.3: R14.1 v1(12.373,9.801)
  Bottom Signal Layer w0.2: v1(12.373,9.801) v1(12.373,12.1)
MISO: DD2.16 X10.1 | length 25
  Top Signal Layer w0.2: DD2.16 29.5,19.881 ccw(c31.054,19.881) v1(29.955,18.782)
  Bottom Signal Layer w0.2: X10.1 18.604,4.775 ccw(c18.604,7.315) 20.4,5.519 27.656,12.775 ccw(c25.86,14.571) 28.4,14.571 28.4,18 cw(c29.182,18) 29.182,18.782 v1(29.955,18.782) ; v1@29.955,18.866 v1@30.027,18.795
MOSI: DD2.15 X10.4 | length 28.2
  Top Signal Layer w0.2: DD2.15 28.7,19.548 ccw(c30.748,19.548) v1(29.3,18.1)
  Bottom Signal Layer w0.2: X10.4 12.954,2.756 cw(c14.75,0.96) 14.75,3.5 18.51,3.5 ccw(c18.51,6.04) 20.306,4.244 28.556,12.494 ccw(c26.76,14.29) 29.3,14.29 v1(29.3,18.1)
NetC1_1: C1.1 C4.2 C5.2 DA2.1 R1.1 X1.1 | length 10.8
  Top Signal Layer w0.2: R1.1 20.223,35.625 cw(c20.223,33.085) 22.019,34.881 22.705,34.195 cw(c21.269,32.759) DA2.1
  Top Signal Layer w1: 19.21,33.145 R1.1 19.21,38.105 cw(c19.4,38.105) 19.4,38.295
NetC7_2: C7.2 DD2.7 Z2.2 | length 13.8
  Top Signal Layer w0.3: C7.2 11.993,20.111 ccw(c11.993,22.651) 13.789,20.855 Z2.2 14.59,21.656 cw(c16.386,19.86) 16.386,22.4 DD2.7
NetC8_2: C8.2 DD2.20 | length 2.1
  Top Signal Layer w0.3: DD2.20 32.231,24 cw(c32.231,22.976) C8.2
NetC12_2: C12.2 DD2.8 Z2.1 | length 15.5
  Top Signal Layer w0.3: C12.2 11.725,15.193 ccw(c11.725,17.733) 13.521,15.937 Z2.1 18.44,20.856 cw(c20.236,19.06) 20.236,21.6 DD2.8
NetDA1_2: DA1.2 L1.1 VD1.1 | length 4.2
  Top Signal Layer w1: 38.35,31.25 DA1.2
NetDD1_3: DD1.3 X4.5 | length 7.1
  Top Signal Layer w0.2: DD1.3 10.566,47.525 ccw(c10.566,50.065) 12.362,48.269 12.774,48.681 ccw(c11.333,50.122) 13.371,50.122 X4.5
NetDD1_4: DD1.4 X4.3 | length 4.8
  Top Signal Layer w0.2: DD1.4 10.125,48.175 ccw(c10.125,48.881) 10.831,48.881 X4.3
NetDD1_7: DD1.7 DD1.8 R6.1 | length 5.1
  Top Signal Layer w0.2: R6.1 4.1,46.223 ; DD1.8@5.78,46.225 cw(c5.755,46.225) 5.755,46.2 5.732,46.223 4.1,46.223 ; DD1.7@5.78,46.875 DD1.7 4.575,46.875 ccw(c4.575,46.5) 4.2,46.5 4.2,46.323 cw(c4.1,46.323) 4.1,46.223
NetDD2_12: DD2.12 R16.2 | length 41.5
  Top Signal Layer w0.2: DD2.12 26.3,19.379 ccw(c28.84,19.379) 27.044,17.583 27.683,16.944 ccw(c29.479,18.74) 29.479,16.2 29.648,16.2 ccw(c29.648,18.74) 31.444,16.944 31.806,17.306 cw(c33.602,15.51) 33.602,18.05 33.885,18.05 ccw(c33.885,20.59) 35.681,18.794 36.643,19.756 cw(c38.439,17.96) 38.439,20.5 44.586,20.5 cw(c44.586,19.004) 45.644,20.062 51.4,14.306 51.4,14.3 53.6,12.1 ccw(c55.049,13.549) 55.049,11.5 R16.2
NetR2_2: R2.2 X2.1 | length 3.1
  Top Signal Layer w0.2: X2.1 56.56,26.45 ccw(c59.1,26.45) 57.304,24.654 R2.2
NetR3_2: R3.2 X2.2 | length 2.8
  Top Signal Layer w0.2: R3.2 55.009,29.907 cw(c55.009,27.714) X2.2
NetR12_2: R12.2 R13.2 VT1.1 | length 6.5
  Top Signal Layer w0.3: R12.2 R13.2 52.762,4.888 cw(c52.762,3.323) 53.869,4.43 cw(c52.828,3.389) 54.3,3.389 VT1.1 VT1.1@54.3,3
NetR14_2: R14.2 R15.2 X4.23 | length 75
  Top Signal Layer w0.2: R14.2 ccw(c10.138,9.801) 9.547,9.21 R15.2
  Top Signal Layer w0.3: v1(8.245,9.801) R14.2
  Bottom Signal Layer w0.2: v1(8.245,9.801) 8.245,36.503 ccw(c5.705,36.503) 7.501,38.299 5.644,40.156 cw(c7.44,41.952) 4.9,41.952 4.9,45.48 cw(c7.44,45.48) 5.644,47.276 7.624,49.256 cw(c9.178,47.701) 9.178,49.9 33.866,49.9 ccw(c33.866,52.44) 35.662,50.644 X4.23
NetR16_1: R16.1 VD2.2 | length 2.2
  Top Signal Layer w0.2: VD2.2 ccw(c62.196,9.378) 62.308,9.378 R16.1
NetVT1_2: VT1.2 Z1.2 | length 6.1
  Top Signal Layer w0.3: Z1.2@53.25,10.45 54.506,9.194 cw(c52.71,7.398) 55.25,7.398 VT1.2 ; VT1.2@55.2,5.05 ccw(c55.25,5.05) VT1.2@55.25,5
PWM_A: DD2.10 X3.2 | length 63.6
  Top Signal Layer w0.2: X3.2 3.652,39.675 ccw(c3.652,37.135) 1.856,38.931 1.469,38.544 ccw(c3.265,36.748) 0.725,36.748 0.725,11.252 ccw(c3.265,11.252) 1.469,9.456 1.556,9.369 ccw(c3.352,11.165) 3.352,8.625 3.923,8.625 ccw(c3.923,11.165) 5.719,9.369 6.906,10.556 cw(c8.702,8.76) 8.702,11.3 14.048,11.3 ccw(c14.048,13.84) 15.844,12.044 21.909,18.109 cw(c23.5,16.518) 23.5,18.768 ccw(c23.5,19.968) 24.7,19.968 DD2.10
PWM_B: DD2.9 X5.2 | length 20.7
  Top Signal Layer w0.2: X5.2 7.156,17.791 cw(c7.156,16.456) 8.1,17.4 ccw(c9.346,18.646) 9.346,16.884 9.662,16.884 cw(c9.662,14.378) v1(11.433,16.15) ; v1(14.3,13.691) 14.787,13.691 ccw(c14.787,16.231) 16.583,14.435 21.604,19.456 cw(c23.4,17.66) 23.4,20.2 DD2.9
  Bottom Signal Layer w0.2: v1(11.433,16.15) 13.604,13.979 ccw(c14.3,14.675) v1(14.3,13.691)
RESET: DD2.29 R17.1 X10.5 | length 40.7
  Top Signal Layer w0.2: X10.5@9.893,4.841 X10.5 10.848,5.73 cw(c11.5,5.078) 11.5,6 13,6 ccw(c13,6.5) 13.5,6.5 13.5,7.466 cw(c13.534,7.466) R17.1 ccw(c13.534,7.115) R17.1@13.261,7.387
  Top Signal Layer w0.3: v1(26.3,27.35) DD2.29
  Bottom Signal Layer w0.2: X10.5@9.893,5.341 X10.5 16.374,11.256 cw(c18.17,9.46) 18.17,12 22.348,12 ccw(c22.348,14.54) 24.144,12.744 26.156,14.756 ccw(c24.36,16.552) 26.9,16.552 26.9,25.901 ccw(c24.851,25.901) v1(26.3,27.35)
SCK: DD2.17 X10.3 | length 29.2
  Top Signal Layer w0.2: DD2.17 cw(c29.934,20.634) 31.3,20.634 v1(31.3,20.1)
  Bottom Signal Layer w0.2: X10.3 12.433,5.381 cw(c14.973,5.381) 13.177,7.177 16.356,10.356 cw(c18.152,8.56) 18.152,11.1 22.748,11.1 ccw(c22.748,13.64) 24.544,11.844 26.756,14.056 ccw(c24.96,15.852) 27.5,15.852 27.5,17.348 cw(c30.04,17.348) 28.244,19.144 28.456,19.356 cw(c30.252,17.56) 30.252,20.1 v1(31.3,20.1)
SCL: DA2.5 DD1.6 DD2.28 R7.1 X7.2 X8.2 X9.2 | length 133
  Top Signal Layer w0.2: R7.1 2.85,50.1 3.7,50.1 cw(c3.7,49.6) 4.2,49.6 4.2,47.925 ccw(c4.6,47.925) 4.6,47.525 DD1.6 5.975,47.525 cw(c5.975,47.1) 6.4,47.1 6.4,45.905 cw(c5.208,45.905) v1(6.051,45.062) ; v1(20.523,30.159) DA2.5 ; X9.2@24.456,14.856 X9.2 25.606,13.494 ccw(c27.402,15.29) 27.402,12.75 33.933,12.75 ccw(c33.933,15.29) 35.729,13.494 X8.2
  Top Signal Layer w0.3: v1(26.745,29.9) cw(c25.888,29.043) 27.1,29.043 DD2.28
  Bottom Signal Layer w0.2: v1(6.051,45.062) 6.051,41.964 ccw(c7.052,41.964) 6.344,41.256 16.697,30.903 ccw(c18.493,32.699) 18.493,30.159 v1(20.523,30.159) 20.65,30.032 20.65,23.131 20.523,23.004 20.523,19.029 ccw(c23.063,19.029) 21.267,17.233 23.326,15.174 ccw(c24.35,16.198) X9.2 ccw(c24.092,15.008) 24.457,15.008 24.457,26.56 cw(c26.997,26.56) 25.201,28.356 v1(26.745,29.9) ; X8.2 cw(c36.985,16.042) 36.072,15.128 34.644,16.556 cw(c36.44,18.352) 33.9,18.352 33.9,20.592 ccw(c31.36,20.592) 33.156,22.388 31.408,24.136 cw(c33.204,25.932) 30.664,25.932 30.664,27.5 cw(c32.439,27.5) 32.439,29.275 50.323,29.275 ccw(c50.323,31.815) 52.119,30.019 57.656,35.556 ccw(c55.86,37.352) 58.4,37.352 58.4,38.5 cw(c60.573,38.5) 59.036,40.036 X7.2
SDA: DA2.6 DD1.5 DD2.27 R8.1 X7.1 X8.3 X9.3 | length 117.2
  Top Signal Layer w0.2: R8.1 6.382,50.118 cw(c6.382,49.7) 6.8,49.7 6.8,48.681 ; DD1.5 6.294,48.175 ccw(c6.294,48.681) 6.8,48.681 ; v1(7.4,45.062) 7.4,45.734 ccw(c6.034,45.734) 7,46.7 cw(c7.483,47.183) 6.8,47.183 6.8,48.681 ; v1(20.506,31.1) 21.443,31.1 cw(c21.443,30.581) 21.81,30.948 cw(c21.351,30.489) 22,30.489 DA2.6 ; X9.3 23.882,16.488 ccw(c25.678,18.284) 25.678,15.744 33.117,15.744 ccw(c33.117,18.284) 34.913,16.488 X8.3 ; DD2.27 DD2.27@27.9,28.857
  Top Signal Layer w0.3: DD2.27 27.9,29.043 cw(c29.112,29.043) v1(28.255,29.9)
  Bottom Signal Layer w0.2: v1(7.4,45.062) cw(c7.732,45.062) 7.497,45.297 7.7,45.5 cw(c8.424,44.776) 8.424,45.8 8.8,45.8 cw(c8.8,44.351) 9.824,45.376 19.762,35.438 cw(c17.966,33.641) 20.506,33.641 v1(20.506,31.1) ; X9.3 23.08,27.474 ccw(c20.54,27.474) 22.336,29.27 v1(20.506,31.1) ; v1(28.255,29.9) 27.799,30.356 ccw(c26.003,28.56) 26.003,31.1 v1(20.506,31.1) ; X8.3 35.715,19.833 ccw(c33.175,19.833) 34.971,21.629 32.144,24.456 cw(c33.92,26.232) 31.408,26.232 31.408,27.6 cw(c32.308,27.6) 32.308,28.5 50.723,28.5 ccw(c50.723,31.04) 52.519,29.244 59.656,36.381 ccw(c57.86,38.177) 60.4,38.177 X7.1
SERVO_S0: DD2.13 R2.1 | length 42.5
  Top Signal Layer w0.2: DD2.13 27.1,19.552 ccw(c29.64,19.552) 27.844,17.756 28.155,17.445 ccw(c29.578,18.868) 29.578,16.856 ccw(c29.578,19.396) 31.374,17.6 31.78,18.006 cw(c33.576,16.21) 33.576,18.75 33.985,18.75 ccw(c33.985,21.29) 35.781,19.494 36.543,20.256 cw(c38.339,18.46) 38.339,21 44.408,21 cw(c44.408,18.605) 46.101,20.299 50.656,15.744 ccw(c52.452,17.54) 52.452,15 53.151,15 ccw(c53.151,17.049) 54.6,15.6 55.456,16.456 ccw(c53.66,18.252) 56.2,18.252 56.2,23.743 R2.1
SERVO_S1: DD2.14 R3.1 | length 44.9
  Top Signal Layer w0.2: DD2.14 27.9,19.573 ccw(c30.44,19.573) 28.449,17.995 28.852,17.592 ccw(c29.619,18.359) 29.619,17.275 ccw(c29.619,18.857) 30.738,17.738 31.506,18.506 cw(c33.302,16.71) 33.302,19.25 33.576,19.25 ccw(c33.576,21.79) 35.372,19.994 36.234,20.856 cw(c38.03,19.06) 38.03,21.6 44.548,21.6 cw(c44.548,19.06) 46.344,20.856 50.956,16.244 ccw(c52.752,18.04) 52.752,15.5 53.077,15.5 ccw(c53.077,17.207) 54.284,16 54.656,16.372 ccw(c52.86,18.168) 55.4,18.168 55.4,20.798 ccw(c52.86,20.798) 54.656,22.594 54.644,22.606 cw(c56.44,24.402) 53.9,24.402 R3.1
"": 
pads on no net: DD2.11 DD2.19 DD2.22 DD2.30 DD2.31 X3. X4.7 X4.8 X4.10 X4.11 X4.12 X4.13 X4.15 X4.16 X4.17 X4.18 X4.19 X4.21 X4.22 X4.24 X4.26 X4.27 X4.28 X4.29 X4.31 X4.32 X4.33 X4.35 X4.36 X4.37 X4.38 X4.40 X5. X8. X9.

## Polygon pours and split planes (outlines as drawn)
8,4В on Top Signal Layer "Top Signal Layer-No Net" (solid, remove dead copper, pour order 54): 5.447,16.866 4.655,16.866 ccw(c4.655,16.224) 4.013,16.224 4.013,15.401 ccw(c4.636,15.401) 4.636,14.778 5.487,14.778 ccw(c5.487,15.291) 6,15.291 6,16.313 ccw(c5.447,16.313)
8,4В on Top Signal Layer "Top Signal Layer-No Net" (solid, remove dead copper, pour order 52): 5.447,38.75 4.655,38.75 ccw(c4.655,38.108) 4.013,38.108 4.013,37.285 ccw(c4.636,37.285) 4.636,36.662 5.487,36.662 ccw(c5.487,37.175) 6,37.175 6,38.197 ccw(c5.447,38.197)
GND on Top Signal Layer "Top Signal Layer-No Net" (solid, remove dead copper, pour order 50): 8.15,35.597 8.15,34.805 cw(c7.508,34.805) 7.508,34.163 6.686,34.163 cw(c6.686,34.786) 6.062,34.786 6.062,35.637 cw(c6.575,35.637) 6.575,36.15 7.597,36.15 cw(c7.597,35.597)
GND on Top Signal Layer "Top Signal Layer-No Net" (solid, remove dead copper, pour order 48): 8.15,13.713 8.15,12.921 cw(c7.508,12.921) 7.508,12.279 6.686,12.279 cw(c6.686,12.902) 6.062,12.902 6.062,13.753 cw(c6.575,13.753) 6.575,14.266 7.597,14.266 cw(c7.597,13.713)
NetC1_1 on Top Signal Layer "GND" (solid, remove dead copper, pour order 2): 4.9,28 12.7,28 ccw(c12.7,31.379) 14.871,28.79 19.9,33.006 19.9,42.4 ccw(c18.8,42.4) 18.8,43.5 14.486,43.5 ccw(c14.485,42.015) 13,42.014 13,36.766 cw(c9.968,36.765) 12.111,34.621 10.333,32.842 cw(c8.24,34.934) 8.24,31.975 4.85,31.975 ccw(c4.85,31.125) 4,31.125 4,28.9 ccw(c4.9,28.9)
8,4В on Top Signal Layer "GND" (solid, remove dead copper, pour order 4): 33.959,41.981 36.86,39.08 cw(c35.315,37.535) 37.5,37.535 37.5,33.945 24.8,33.945 24.8,39.08 24.8,42.295 cw(c25.998,42.295) 25.998,43.493 30.308,43.493 cw(c30.308,38.329)
no net on Top Signal Layer "GND" (solid, remove dead copper, pour order 16): 61.5,3.5
5В on Top Signal Layer "GND" (solid, remove dead copper, pour order 10): 47.977,43 51.393,43 cw(c51.393,39.362) 53.966,41.934 59.334,36.566 cw(c56.844,34.075) 60.366,34.075 60.366,25.862 cw(c59.804,25.862) 59.804,25.3 58.5,25.3 cw(c58.5,26.1) 57.7,26.1 57.7,30.5 ccw(c56.697,30.5) 56.697,31.503 53.476,31.503 ccw(c53.475,30.528) 52.5,30.527 52.5,22.5 ccw(c53,22.5) 53,22 53.8,22 cw(c53.8,21.3) 54.5,21.3 54.5,17.549 cw(c53.76,17.549) 53.76,16.808 52.627,16.808 cw(c52.627,18.124) 51.697,17.194 46.76,22.131 cw(c48.595,23.966) 46,23.966 46,36.87 46,41.023 cw(c47.977,41.023)
NetDA1_2 on Top Signal Layer "GND" (solid, remove dead copper, pour order 6): 31.5,32.585 31.5,31.143 ccw(c32.327,31.143) 32.327,30.316 34.716,30.316 cw(c34.716,29.66) 35.372,29.66 35.372,26.382 ccw(c36.254,26.382) 36.254,25.5 40,25.5 ccw(c40,26.5) 41,26.5 41,32.488 ccw(c39.956,32.488) 39.956,33.532 32.448,33.532 ccw(c32.447,32.585)
8,4В on Power Layer "Top Signal Layer-No Net" (solid, remove dead copper, pour order 38): 1.654,43 30.441,43 cw(c30.441,41.691) 31.75,41.691 31.75,35.485 cw(c30.561,35.485) 30.561,34.296 21.149,34.296 ccw(c21.149,30.609) 18.541,33.216 6.514,21.189 ccw(c7.754,19.948) 6,19.948 6,14.863 cw(c5.102,14.863) 5.102,13.965 1.435,13.965 cw(c1.435,14.894) 0.506,14.894 0.506,41.852 cw(c1.654,41.852)
5В on Power Layer "Top Signal Layer-No Net" (solid, remove dead copper, pour order 34): 3.096,55.7 61.9,55.7 cw(c61.9,52.9) 64.7,52.9 64.7,3 cw(c62.1,3) 62.1,0.4 9.403,0.4 cw(c9.403,1.667) 8.136,1.667 8.136,21.404 cw(c9.592,21.404) 8.563,22.434 19.432,33.304 cw(c20.51,32.226) 20.51,33.75 31.069,33.75 ccw(c31.069,34.931) 32.25,34.931 32.25,42.45 ccw(c31.3,42.45) 31.3,43.4 1.301,43.4 cw(c1.301,44.401) 0.3,44.398 0.278,52.875 cw(c3.096,52.882)
GND on Ground Layer "Top Signal Layer-No Net" (solid, remove dead copper, pour order 36): 0.3,52.902 0.3,3.009 ccw(c3.009,3.009) 3.009,0.3 61.919,0.3 ccw(c61.919,3.06) 64.679,3.06 64.679,52.951 ccw(c61.936,52.951) 61.936,55.694 3.092,55.694 ccw(c3.092,52.902)

## Keep-outs
Keep-Out Layer:
  lines w0.2: 0,3 0,53 0.058,53.585 0.228,54.148 0.506,54.667 0.879,55.121 1.333,55.494 1.852,55.772 2.415,55.942 3,56 62,56 62.585,55.942 63.148,55.772 63.667,55.494 64.121,55.121 64.494,54.667 64.772,54.148 64.942,53.585 65,53 65,16.829 65,3 64.942,2.415 64.772,1.852 64.494,1.333 64.121,0.879 63.667,0.506 63.148,0.228 62.585,0.058 62,0 45.475,0 45.475,19 45.453,19.208 45.389,19.407 45.284,19.588 45.144,19.743 44.975,19.866 44.784,19.951 44.58,19.995 44.37,19.995 44.166,19.951 43.975,19.866 43.806,19.743 43.666,19.588 43.561,19.407 43.497,19.208 43.475,19 43.475,0 3,0 2.415,0.058 1.852,0.228 1.333,0.506 0.879,0.879 0.506,1.333 0.228,1.852 0.058,2.415 0,3

## Silkscreen, mask and mechanical layers (free items; w line width, h text height)
Top Overlay:
  circle w0.2: c61.5,3.5 r2.75
  circle w0.2: c3.5,3.5 r2.75
  circle w0.2: c61.5,52.5 r2.75
  rectangle: 0.788,24.9 1.4,26.65
  region: 8.334,37.6 8.334,32.807 15.672,32.807 15.672,37.6
  rectangle: 14.973,4.775 17.241,6.55
  lines w0.2: 52,21.75 54,21.75 ; 53,20.75 53,22.75
  text "10к" at 3.882,53.25 h1.5 r90
  text "10к" at 6.357,53.25 h1.5 r90
  text "200к" at 1.6,47.225 h1.5 r90
  text "GND" at 64.7,45.6 h2 r90
  text "5B" at 64.7,43.4 h2 r90
  text "10к" at 5.932,43.075 h1.5
  text "RIGHT" at 0.35,41 h2.3 r270
  text "SCL" at 64.7,40.2 h2 r90
  text "DISPLAY" at 58.421,37.505 h2 r90
  text "SDA" at 64.7,36.428 h2 r90
  text "0.01" at 15.875,34.525 h1.5
  text "S" at 57.4,33 h3 r90
  text "10к" at 5.872,32.125 h1.5
  text "PWR" at 59.969,31.3 h3 r90
  text "GND" at 62.5,31.3 h3 r90
  text "100" at 54.931,31.027 h1.5 r90
  text "2,2u" at 10.531,30.648 h1.5 r90
  text "2,2u" at 13.434,30.6 h1.5 r90
  text "SK34A" at 32.375,30.616 h1.5 r90
  text "0.1u" at 27.894,30.45 h1.5
  text "1" at 64.8,29 h2.3 r90
  text "+" at 0.1,27.953 h5
  text "0" at 64.8,26.3 h2.3 r90
  text "0.1u" at 15.5,25.9 h1.5
  text "0,1u" at 33.475,25 h1.5
  text "0.1u" at 15.5,23.75 h1.5
  text "10к" at 61.5,21.965 h1.5
  text "100" at 57.17,21.92 h1.5
  text "10к" at 5.872,21.35 h1.5
  text "22" at 11.575,19.85 h1.5 r90
  text "0,1u" at 33.6,19.45 h1.5
  text "LEFT" at 0.3,18.6 h2.3 r270
  text "BUTTON" at 64.7,15.744 h2 r90
  text "22" at 11.55,14.95 h1.5 r90
  text "510" at 61.5,12.7 h1.5
  text "1к" at 10.6,11.1 h1.5
  text "10к" at 5.9,10.2 h1.5
  text "10к" at 14.9,8.732 h1.5
  text "ACT" at 59.562,6.9 h2
  text "1,8к" at 6.387,6.5 h1.5
  text "100" at 50,5.9 h1.5 r90
  text "10к" at 52.4,5.9 h1.5 r90
  text "ISP" at 8.291,2.931 h3 r90
Bottom Overlay:
  circle w0.2: c61.5,52.5 r2.75
  circle w0.2: c3.5,3.5 r2.75
  circle w0.2: c61.5,3.5 r2.75
  region: 23.85,44.875 13.95,44.875 13.95,24.475 23.85,24.475
  lines w0.2: 53.3,19.1 55.3,19.1 ; 54.3,18.1 54.3,20.1 ; 8.825,29.692 8.825,38.967 13.225,38.967 13.225,29.742 13.175,29.692 8.825,29.692
  text "v2.1" at 12.725,38.425 h2 r90
  text "EduBOT" at 11.125,38.4 h3 r90
Mechanical 7:
  lines w0.2: 15,41 18,41 ; 16.5,39.5 16.5,42.5 ; 27.125,41 30.125,41 ; 28.625,39.5 28.625,42.5 ; 49.7,41 52.7,41 ; 50,11.45 53,11.45 ; 51.2,39.5 51.2,42.5 ; 51.5,9.95 51.5,12.95
Mechanical 9:
  text "C1" at 10.2,39.4 h3
  text "C2" at 22.1,39.4 h3
  text "C3" at 53.15,37 h3
  text "DD2" at 23.2,28.2 h3
  text "Z2" at 15.3,10.4 h3 r90
  text "Z1" at 56.6,8.7 h3
Mechanical 11:
  circle w0.2: c52.8,14.5 r5.7
  circle w0.2: c24.1,27 r0.447
  lines w0.2: 30.2,27.8 30.2,20.9 23.2,20.9 23.2,27.9 30.2,27.9 ; 12.1,13.4 12.1,24.7 16.6,24.7 16.6,13.4 12.1,13.4